# Altium PCB Nhúng.PcbDoc
Units mil, origin at the board's own origin, x right, y up, seen from the top; angles counter-clockwise.
Board outline 4140 x 2705 mil, 2 copper layers (Top Layer, Bottom Layer); 19 components, 10 nets, 71 pads, 4 vias.
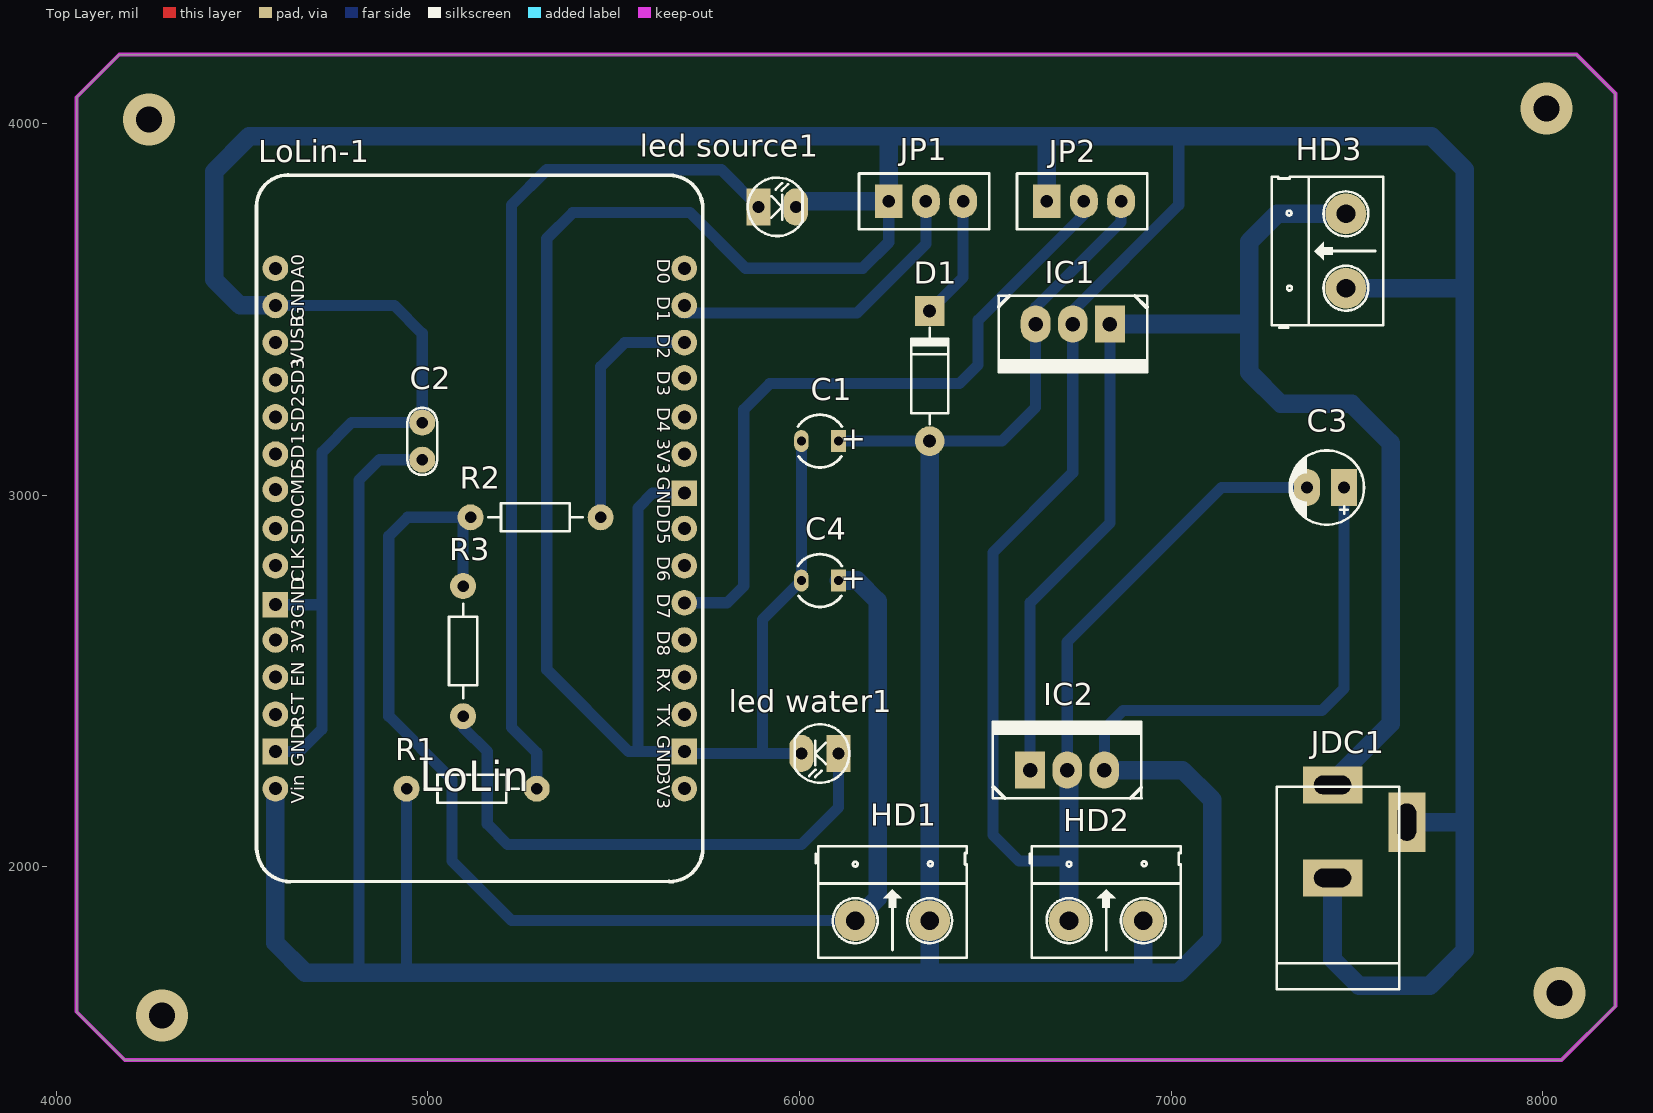
[diagram p0: Top Layer view]
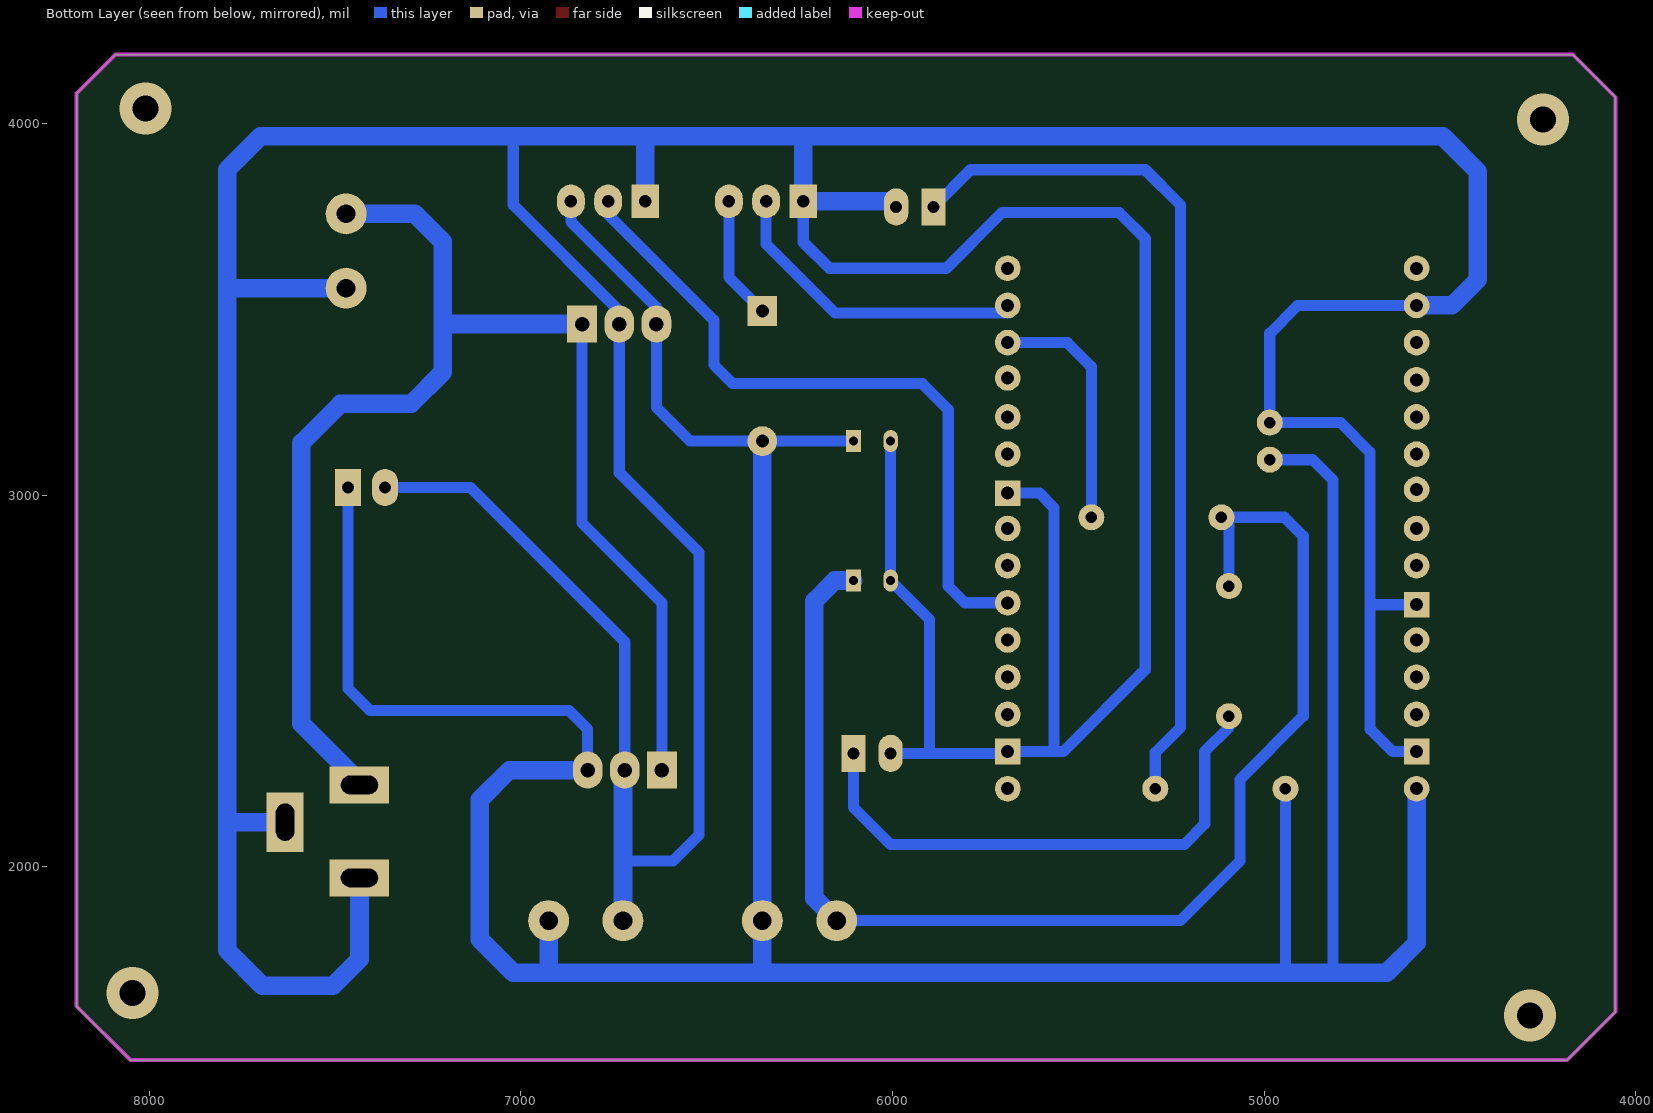
[diagram p1: Bottom Layer view, seen from below]
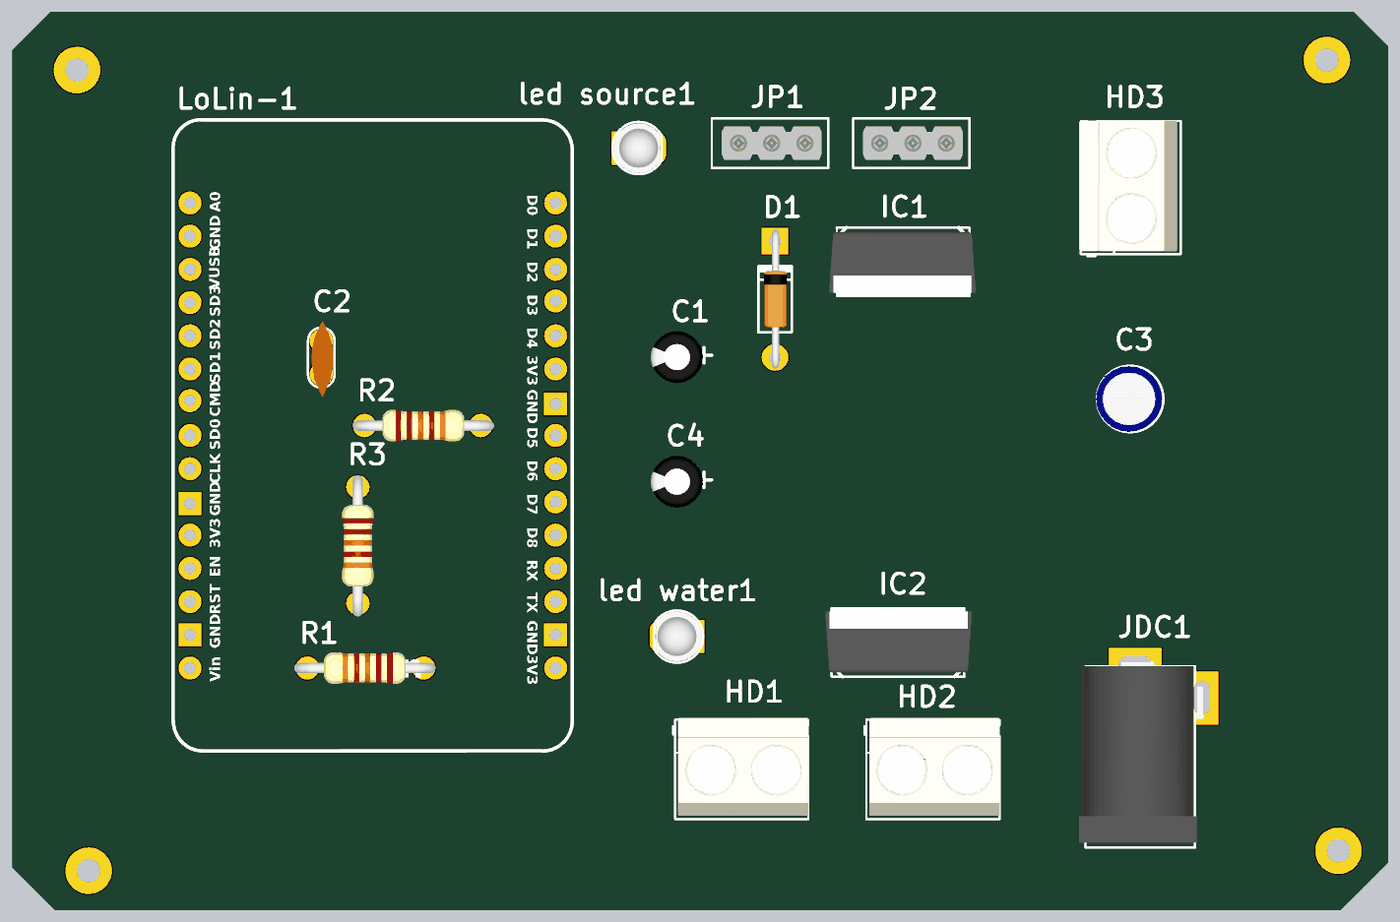
[diagram p2: 3D render of the assembled board from above, using the file's embedded part models]

## Layer stack, top to bottom
Top Solder: solder mask 0.4, Solder Resist, Dk 3.5
Top Layer: signal copper 1.4
Dielectric 1: dielectric 12.6, FR-4, Dk 4.8
Bottom Layer: signal copper 1.4
Bottom Solder: solder mask 0.4, Solder Resist, Dk 3.5

## Board outline
4055,1610 4185,1480 8050,1480 8195,1625 8195,4080 8090,4185 4170,4185 4055,4070

## Design rules (kind name [scope] priority, off if disabled: settings)
Clearance [All] p1: gap=10
PolygonConnect [All] p1: connectstyle=Relief reliefconductorwidth=10 reliefentries=4 polygonreliefangle="90 Angle" airgapwidth=10
RoutingVias [All] p1: holewidth=28 width=50 viastyle="Through Hole" minholewidth=28 minwidth=50 maxholewidth=28 maxwidth=50
SolderMaskExpansion [All] p1: expansion=4
Width [All] p1: maxlimit=50 minlimit=50 preferedwidth=50
30 further rules are at their usual default settings.

## Components (designator, comment, footprint, x,y, rotation, side; value= is the part's Value field where it differs from the comment)
C1 "47u/16V" C3MM 6055,3145 r180 top
C2 "103" CN1 4985,3195 r270 top
C3 "1000uF" CP1/2 7465,3020 r180 top
C4 "47u/16V" C3MM 6055,2770 r180 top
D1 "1N4007" D1A 6350,3145 r270 top
HD1 "water" HED2 6150,1855 r0 top
HD2 "Header 2" HED2 6725,1855 r0 top
HD3 "Header 2" HED2 7470,3556.43 r90 top
IC1 "LM7805" QTO-220 6835,3460 r180 top
IC2 "LM7805" QTO-220 6620,2260 r0 top
JDC1 "Jac DC" DC-IN 7533.84,2095 r90 top
JP1 "CON3" jam3 6235,3790 r0 top
JP2 "CON3" jam3 6660,3790 r0 top
"led source1" "LED" LED-3 5890,3775 r0 top
"led water1" "LED" LED-3 6105,2305 r180 top
LoLin-1 "NodeMCU V1.0 ESP-12E_1" "LoLin NodeMcu V3" 4639,3856 r0 top
R1 "470" R1/4W 4943,2210 r0 top
R2 "150" R1/4W 5465,2940 r180 top
R3 "470" R1/4W 5095,2405 r90 top

## Footprints (in the part's own frame and the unit in brackets; to place one, negate y for a bottom-side part, rotate by r counter-clockwise, add the part's x,y. Pads: shape width x height; smd on the part's side, far side on the other; paste and mask are expansions set on the pad)
C3MM [mm]
  rect 1x1.5 hole 0.6: 1(-1.27,0)
  oval 1x1.5 hole 0.6: 2(1.27,0)
  silkscreen extent -1.5,-1.81 1.5,1.8, body extent -2,-2.03 1.99,1.97, height 7.01
CN1 [mil]
  round 70 hole 31: 1(0,0) 2(100,0)
  silkscreen extent -40,-40 141,40, body extent -60,-30 170,37, height 265
CP1/2 [mil] "Tu hoa < 22uF/16>50V"
  rect 70x100 hole 32: 1(0,0)
  oval 70x100 hole 32: 2(100,0)
  silkscreen extent -53,-100 147,100, body extent -49,-99 149,99, height 287
D1A [mil] "Diode 1A, W 100mil, L 350mil"
  round 80 hole 35: 1(0,0)
  rect 80x80 hole 35: 2(-350,0)
  silkscreen extent -305,-50 -45,50, body extent -386,-33 34,36, height 84
DC-IN [mil] "Jac DC input"
  rect 100x160 hole 50 slot 100 at 90 deg: 1(125,100) 2(-125,100)
  rect 160x100 hole 50 slot 100 at 0 deg: 3(25,-100)
  silkscreen extent -425,-80 120,250, body extent -410,-105 134,269, height 434
HED2 [mil] "Header 2, 2 pin, hight 300mil, Pin to Pin 200, Colour Green"
  round 110 hole 50: 1(0,0) 2(200,0)
  silkscreen extent -106,-100 300,200, body extent -92,-90 302,205, height 394
jam3 [mil]
  rect 75x90 hole 34: 1(5,0)
  oval 75x90 hole 34: 2(105,0) 3(205,0)
  silkscreen extent -75,-75 275,75, body extent -45,-50 255,50, height 704
LED-3 [mil] "LED 2 PIN, 3ly Only colour"
  rect 65x100 hole 32: 1(0,0)
  oval 65x100 hole 32: 2(100,0)
  silkscreen extent -29,-78 118,79, body extent -25,-75 113,75, height 217
"LoLin NodeMcu V3" [mil]
  round 69 hole 35: 3V3(-49,-1246) 3V3(1051,-1646) 3V3(1051,-746) A0(-49,-246) CLK(-49,-1046) CMD(-49,-841) D0(1051,-246) D1(1051,-346) D2(1051,-446) D3(1051,-541) D4(1051,-646) D5(1051,-946) D6(1051,-1046) D7(1051,-1146) D8(1051,-1246) EN(-49,-1346) GND(-49,-346) RST(-49,-1446) RX(1051,-1346) SD0(-49,-946) SD1(-49,-746) SD2(-49,-646) SD3(-49,-546) TX(1051,-1446) VIN(-49,-1646) VUSB(-49,-446)
  rect 69x69 hole 35: GND(-49,-1546) GND(-49,-1151) GND(1051,-1546) GND(1051,-851)
  silkscreen extent -100,-1896 1101,5
QTO-220 [mil] "TO-220 - 1-2-3"
  rect 80x100 hole 39: 1(0,0)
  oval 80x100 hole 39: 2(100,0) 3(200,0)
  silkscreen extent -100,-76 300,130, body extent -119,-64 322,121, height 905
R1/4W [mil] "R 1/4W, 2 Pin, 350mil"
  round 70 hole 31: 1(0,0) 2(350,0)
  silkscreen extent 48,-38 302,38, body extent -40,-47 386,47, height 111

## Part data
C1 C4: library part "Cap Pol", "Polarized Capacitor (Axial)"
C2: library part "CAP gom"
C3: library part CP1, "Cap P  0,1uF < 22uF , 16 - 50V"
D1: library part D1A, "Diode 1A"
HD1: library part "Header 2", "Header 2 (Green)"
HD2 HD3: "Header 2 (Green)"
IC1 IC2: library part LM78xx, "On ap +, from + 5 to + 24VDC"
JDC1: library part DCIN, "Jac DC input"
JP1 JP2: library part "jam 3", "jam 3"
"led source1" "led water1": "LED Single colour Green and Red"
LoLin-1: "LoLin NodeMCU V3"
R1 R2 R3: library part R1/4W, "Resistor 1/4W"

## Via types
v1: diameter 140, hole 70, Top Layer to Bottom Layer, 4 vias

## Nets (pads, with @x,y where several pads share a name; then routed paths per layer and width w, separated by ;. In a path a pad name is that pad's centre, name@x,y a point inside that pad or via, vN(x,y) a via of type N, cw(c..) or ccw(c..) an arc to the next point about the centre after c; other vN are vias at no path point)
5V: C1.1 C2.2 C3.1 D1.1 HD1.2 HD2.2 IC1.3 IC2.3 JP2.3 LoLin-1.VIN R1.1 | length 9859.8
  Bottom Layer w30: 4815,1715 4815,3040 4870,3095 C2.2 ; R1.1 4943,1727 4955,1715 ; C1.1 D1.1 6545,3145 6635,3235 IC1.3 6635,3505 6865,3735 JP2.3 ; IC2.3 6820,2370 6870,2420 7405,2420 7465,2480 C3.1
  Bottom Layer w50: LoLin-1.VIN 4590,1795 4670,1715 4815,1715 4955,1715 6335,1715 ; D1.1 HD1.2 6350,1730 6335,1715 ; IC2.3 7030,2260 7110,2180 7110,1805 7020,1715 6915,1715 ; HD2.2 6925,1725 6915,1715 ; 6335,1715 6915,1715
12V: HD3.2 IC1.1 IC2.1 JDC1.1 | length 3749.9
  Bottom Layer w30: IC2.1 6620,2710 6835,2925 IC1.1
  Bottom Layer w50: IC1.1 7210,3460 ; JDC1.1 7433.84,2228.84 7590,2385 7590,3140 7485,3245 7295,3245 7210,3330 7210,3460 ; HD3.2 7285,3756.43 7210,3681.43 7210,3460
CONTROL: JP2.2 LoLin-1.D7 | length 1891.4
  Bottom Layer w30: LoLin-1.D7 5805,2710 5850,2755 5850,3230 5920,3300 6430,3300 6480,3350 6480,3470 6765,3755 JP2.2
GND: "led source1.2" "led water1.2" C1.2 C2.1 C3.2 C4.2 HD2.1 HD3.1 IC1.2 IC2.2 JDC1.2 JDC1.3 JP1.1 JP2.1 LoLin-1.GND | length 18405.5
  Bottom Layer w30: LoLin-1.GND@4590,2310 4655,2310 4715,2370 4715,2710 ; LoLin-1.GND@4590,2705 4710,2705 4715,2710 ; LoLin-1.GND@4590,3510 4910,3510 4985,3435 C2.1 4795,3195 4715,3115 4715,2710 ; LoLin-1.GND@5690,3005 5605,3005 5565,2965 5565,2310 ; 5993.04,2310 5994.02,2309.02 ; 6005,2305 5900,2305 ; C1.2 C4.2 5900,2665 5900,2305 ; JP1.1 6240,3680 6170,3610 5855,3610 5705,3760 5390,3760 5320,3690 5320,2530 5540,2310 5565,2310 ; IC2.2 6720,2605 7135,3020 C3.2 ; 6725,2015 6590,2015 6520,2085 6520,2845 6735,3060 IC1.2 6735,3495 7020,3780 7020,3965 ; 5565,2310 5690,2310 5695,2305 5900,2305
  Bottom Layer w50: LoLin-1.GND@4590,3510 4495,3510 4425,3580 4425,3870 4520,3965 6240,3965 ; 5990,3775 6005,3790 JP1.1 6240,3965 ; JP2.1 6665,3960 6670,3965 ; IC2.2 6725,2255 6725,2015 HD2.1 ; JDC1.2 7433.84,1751.16 7505,1680 7695,1680 7790,1775 7790,2120 ; HD3.1 7788.57,3556.43 7790,3555 ; JDC1.3 7790,2120 ; 6240,3965 6670,3965 ; 6670,3965 7020,3965 7700,3965 7790,3875 7790,3555 ; 7790,2120 7790,3555
HAND: JP1.2 LoLin-1.D1 | length 846.6
  Bottom Layer w30: LoLin-1.D1@5685,3490 6155,3490 6340,3675 JP1.2
LED: LoLin-1.D2 R2.1 | length 656.9
  Bottom Layer w30: R2.1 5465,3345 5530,3410 LoLin-1.D2
NetC4_1: C4.1 HD1.1 R2.2 R3.2 | length 3543.3
  Bottom Layer w30: R3.2 5095,2920 R2.2 4945,2940 4895,2890 4895,2405 5065,2235 5065,2015 5225,1855 HD1.1
  Bottom Layer w50: C4.1 6155,2770 6210,2715 6210,1915 HD1.1
NetD1_2: D1.2 JP1.3 | length 304
  Bottom Layer w30: D1.2@6370,3515 6440,3585 JP1.3
"Netled source1_1": "led source1.1" R1.2 | length 2343.9
  Bottom Layer w30: R1.2 5293,2307 5225,2375 5225,3780 5320,3875 5790,3875 5890,3775
"Netled water1_1": "led water1.1" R3.1 | length 1471.1
  Bottom Layer w30: R3.1 5095,2375 5160,2310 5160,2115 5215,2060 6005,2060 6105,2160 6105,2305
pads on no net: LoLin-1.3V3 LoLin-1.A0 LoLin-1.CLK LoLin-1.CMD LoLin-1.D0 LoLin-1.D3 LoLin-1.D4 LoLin-1.D5 LoLin-1.D6 LoLin-1.D8 LoLin-1.EN LoLin-1.RST LoLin-1.RX LoLin-1.SD0 LoLin-1.SD1 LoLin-1.SD2 LoLin-1.SD3 LoLin-1.TX LoLin-1.VUSB
copper on no net:
  other v1: 4285,1600 8045,1660 4250,4010 8010,4040

## Keep-outs
Keep-Out Layer:
  lines w10: 8195,1640 8195,1625 ; 8195,1625 8050,1480 4185,1480 4055,1610 4055,4010 4055,4070 4170,4185 8090,4185 8195,4080 8195,1625

## Text inside footprints (layer, text, board x,y; h text height)
C1: Top Overlay "+" at 6180,3175 h60 r180
C4: Top Overlay "+" at 6180,2800 h60 r180
LoLin-1: Top Overlay "LoLin" at 4979,2176 h140; Top Overlay "CLK" at 4680,2766 h60 r90; Top Overlay "SD0" at 4680,2866.43 h60 r90; Top Overlay "SD1" at 4680,3067.29 h60 r90; Top Overlay "SD2" at 4680,3167.71 h60 r90; Top Overlay "SD3" at 4680,3268.14 h60 r90; Top Overlay "VUSB" at 4679,3351 h60 r90; Top Overlay "GND" at 4680,3469 h60 r90; Top Overlay "A0" at 4680,3583 h60 r90; Top Overlay "D5" at 5605,2935 h60 r270; Top Overlay "GND" at 5605,3049 h60 r270; Top Overlay "3V3" at 5605,3150.99 h60 r270; Top Overlay "D4" at 5605,3236 h60 r270; Top Overlay "D3" at 5605,3334.42 h60 r270; Top Overlay "D2" at 5605,3434.42 h60 r270; Top Overlay "D1" at 5605,3534.65 h60 r270; Top Overlay "D0" at 5605,3636 h60 r270; Top Overlay "CMD" at 4680,2966.86 h60 r90; Top Overlay "D6" at 5605,2835.88 h60 r270; Top Overlay "3V3" at 5605,2250 h60 r270; Top Overlay "GND" at 5605,2353.8 h60 r270; Top Overlay "TX" at 5605,2437 h60 r270; Top Overlay "RX" at 5605,2535.94 h60 r270; Top Overlay "D8" at 5605,2634.89 h60 r270; Top Overlay "D7" at 5605,2734.77 h60 r270; Top Overlay "Vin" at 4680,2169 h60 r90; Top Overlay "GND" at 4680,2269 h60 r90; Top Overlay "RST" at 4680,2372 h60 r90; Top Overlay "EN" at 4680,2484 h60 r90; Top Overlay "3V3" at 4680,2571 h60 r90; Top Overlay "GND" at 4680,2668 h60 r90